# Altium PCB sensordoline.PcbDoc
Units mil, origin at the board's own origin, x right, y up, seen from the top; angles counter-clockwise.
Board outline 440 x 725 mil, 2 copper layers (Top Layer, Bottom Layer); 5 components, 4 nets, 11 pads, 0 vias.
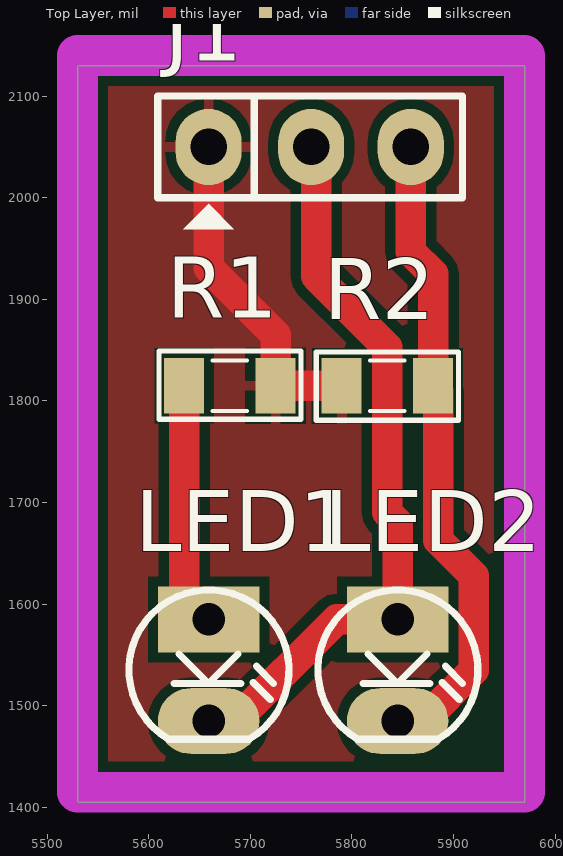
[diagram p0: Top Layer view]
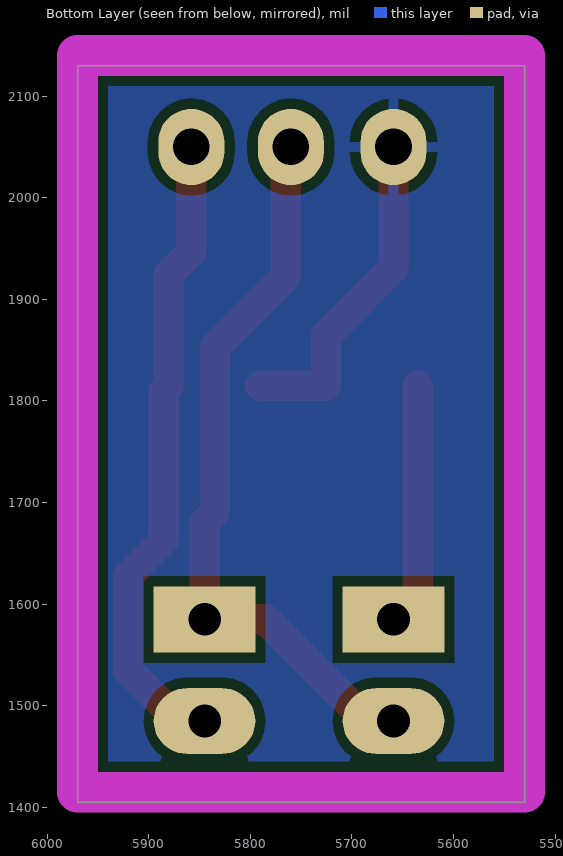
[diagram p1: Bottom Layer view, seen from below]
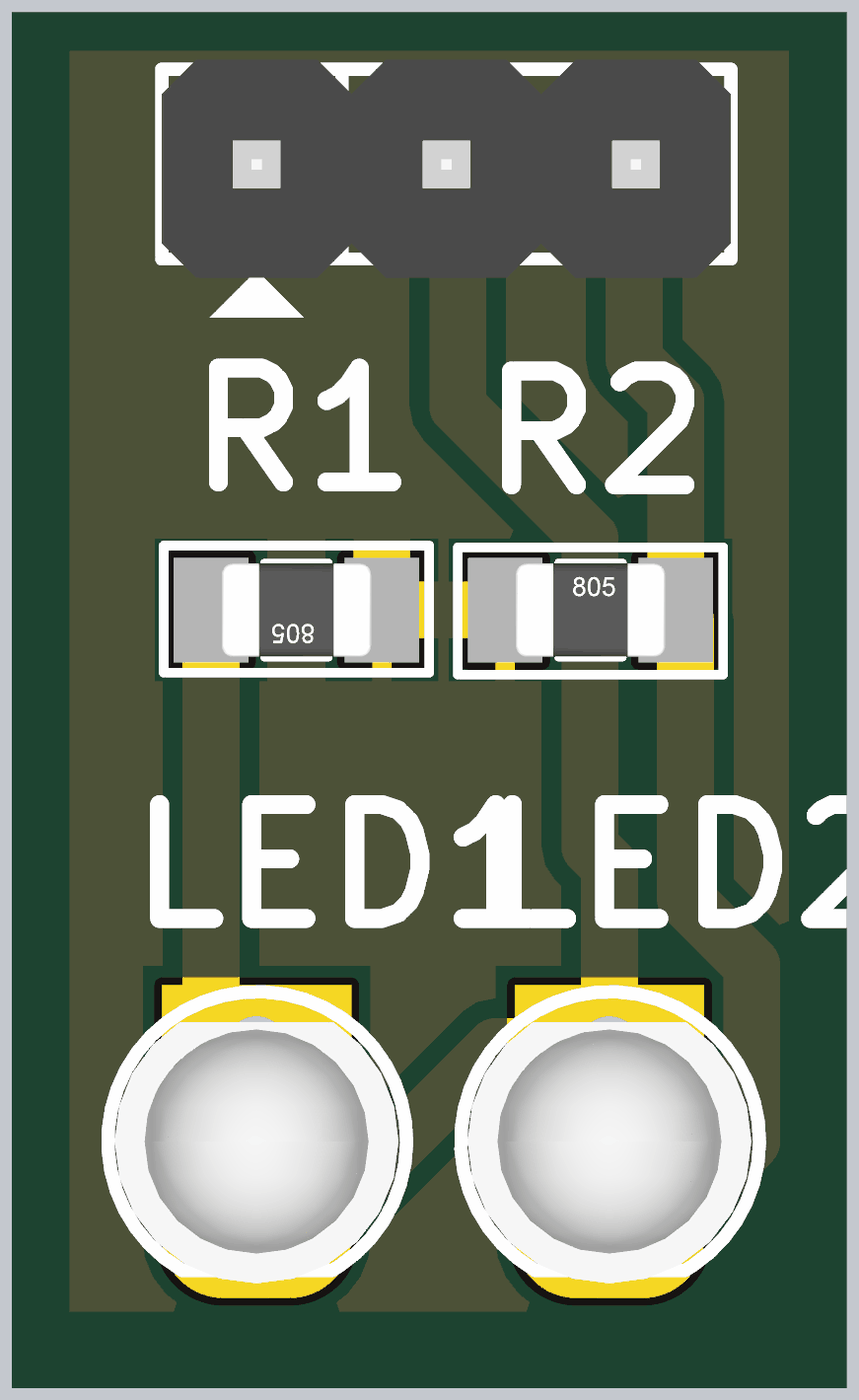
[diagram p2: 3D render of the assembled board from above, using the file's embedded part models]

## Layer stack, top to bottom
Top Solder: solder mask 0.4, Solder Resist, Dk 3.5
Top Layer: signal copper 1.4
Dielectric 1: dielectric 12.6, FR-4, Dk 4.8
Bottom Layer: signal copper 1.4
Bottom Solder: solder mask 0.4, Solder Resist, Dk 3.5

## Board outline
5530,1405 5970,1405 5970,2130 5530,2130

## Design rules (kind name [scope] priority, off if disabled: settings)
Clearance [All] p1: gap=10 ignorepadtopadclearanceinfootprint=FALSE except(0: Arc-Hole Track-Hole SMDPad-Hole THPad-Hole Via-Hole Fill-Hole Poly-Hole Region-Hole Text-Hole)
PolygonConnect [All] p1: connectstyle=Relief reliefconductorwidth=10 reliefentries=4 polygonreliefangle="90 Angle" airgapwidth=10
RoutingVias [All] p1: holewidth=28 width=50 viastyle="Through Hole" minholewidth=28 minwidth=50 maxholewidth=28 maxwidth=50
SolderMaskExpansion [All] p1: expansion=4
Width [All] p1: maxlimit=40 minlimit=20 preferedwidth=30
30 further rules are at their usual default settings.

## Components (designator, comment, footprint, x,y, rotation, side; value= is the part's Value field where it differs from the comment)
J1 "Jumper 3" JP3 5759,2050 r0 top value=J3
LED1 "LED" LED-3 5659,1585 r270 top value="LED 3 ly Single Colour"
LED2 "LED" LED-3 5845,1585 r270 top value="LED 3 ly Single Colour"
R1 "1k" RES-SMD-0805 5680,1815 r180 top value="R1/4W - 1K"
R2 "1k" RES-SMD-0805 5835,1815 r0 top value="R1/4W - 1K"

## Footprints (in the part's own frame and the unit in brackets; to place one, negate y for a bottom-side part, rotate by r counter-clockwise, add the part's x,y. Pads: shape width x height; smd on the part's side, far side on the other; paste and mask are expansions set on the pad)
JP3 [mil] "Jumper 3"
  oval 65x75 hole 36: 1(-100,0) 2(1,0) 3(99,0)
  silkscreen extent -150,-81 150,50, body extent -150,-60 150,55, height 355
LED-3 [mil] "LED 2 PIN, 3ly Only colour"
  rect 65x100 hole 32: 1(0,0)
  oval 65x100 hole 32: 2(100,0)
  silkscreen extent -29,-78 118,79, body extent -13,-75 125,75, height 217
RES-SMD-0805 [mil]
  rect 39.37x55 smd: 1(-45,0) 2(45,0)
  silkscreen extent -70,-34 70,33, body extent -39,-25 39,25, height 31

## Part data
J1: library part JP3
LED1 LED2: "LED Single colour Green and Red"
R1 R2: library part R, "Resistor 1/4W"

## Nets (pads, with @x,y where several pads share a name; then routed paths per layer and width w, separated by ;. In a path a pad name is that pad's centre, name@x,y a point inside that pad or via, vN(x,y) a via of type N, cw(c..) or ccw(c..) an arc to the next point about the centre after c; other vN are vias at no path point)
GND: J1.1 R1.1 R2.1 | length 327.3
  Top Layer w30: J1.1 5659,1931 5725,1865 R1.1 R2.1
NetJ1_2: J1.2 LED1.2 LED2.1 | length 727.6
  Top Layer w30: LED1.2 5685,1485 5785,1585 LED2.1 5845,1680 5834.68,1690.32 5834.68,1852.86 5765,1922.54 5765,2045 J1.2
NetJ1_3: J1.3 LED2.2 R2.2 | length 636.4
  Top Layer w30: LED2.2 5870,1485 5920,1535 5920,1627.86 5885,1662.86 5885,1810 R2.2 5880,1925 5858,1947 J1.3
NetLED1_1: LED1.1 R1.2 | length 239.9
  Top Layer w30: R1.2 5635,1609 LED1.1

## Polygon pours and split planes (outlines as drawn)
GND on Top Layer "GND_top" (solid, pour order 0): 5530,2140 5970,2140 5970,1415 5530,1415
GND on Bottom Layer "GND_top" (solid, pour order 2): 5530,2140 5970,2140 5970,1415 5540,1415 5540,2130

## Keep-outs
Keep-Out Layer:
  lines w40: 5530,1415 5970,1415 5970,2140 5530,2140 5530,1415